# EAGLE board PCB (EAGLE 9.7.0)
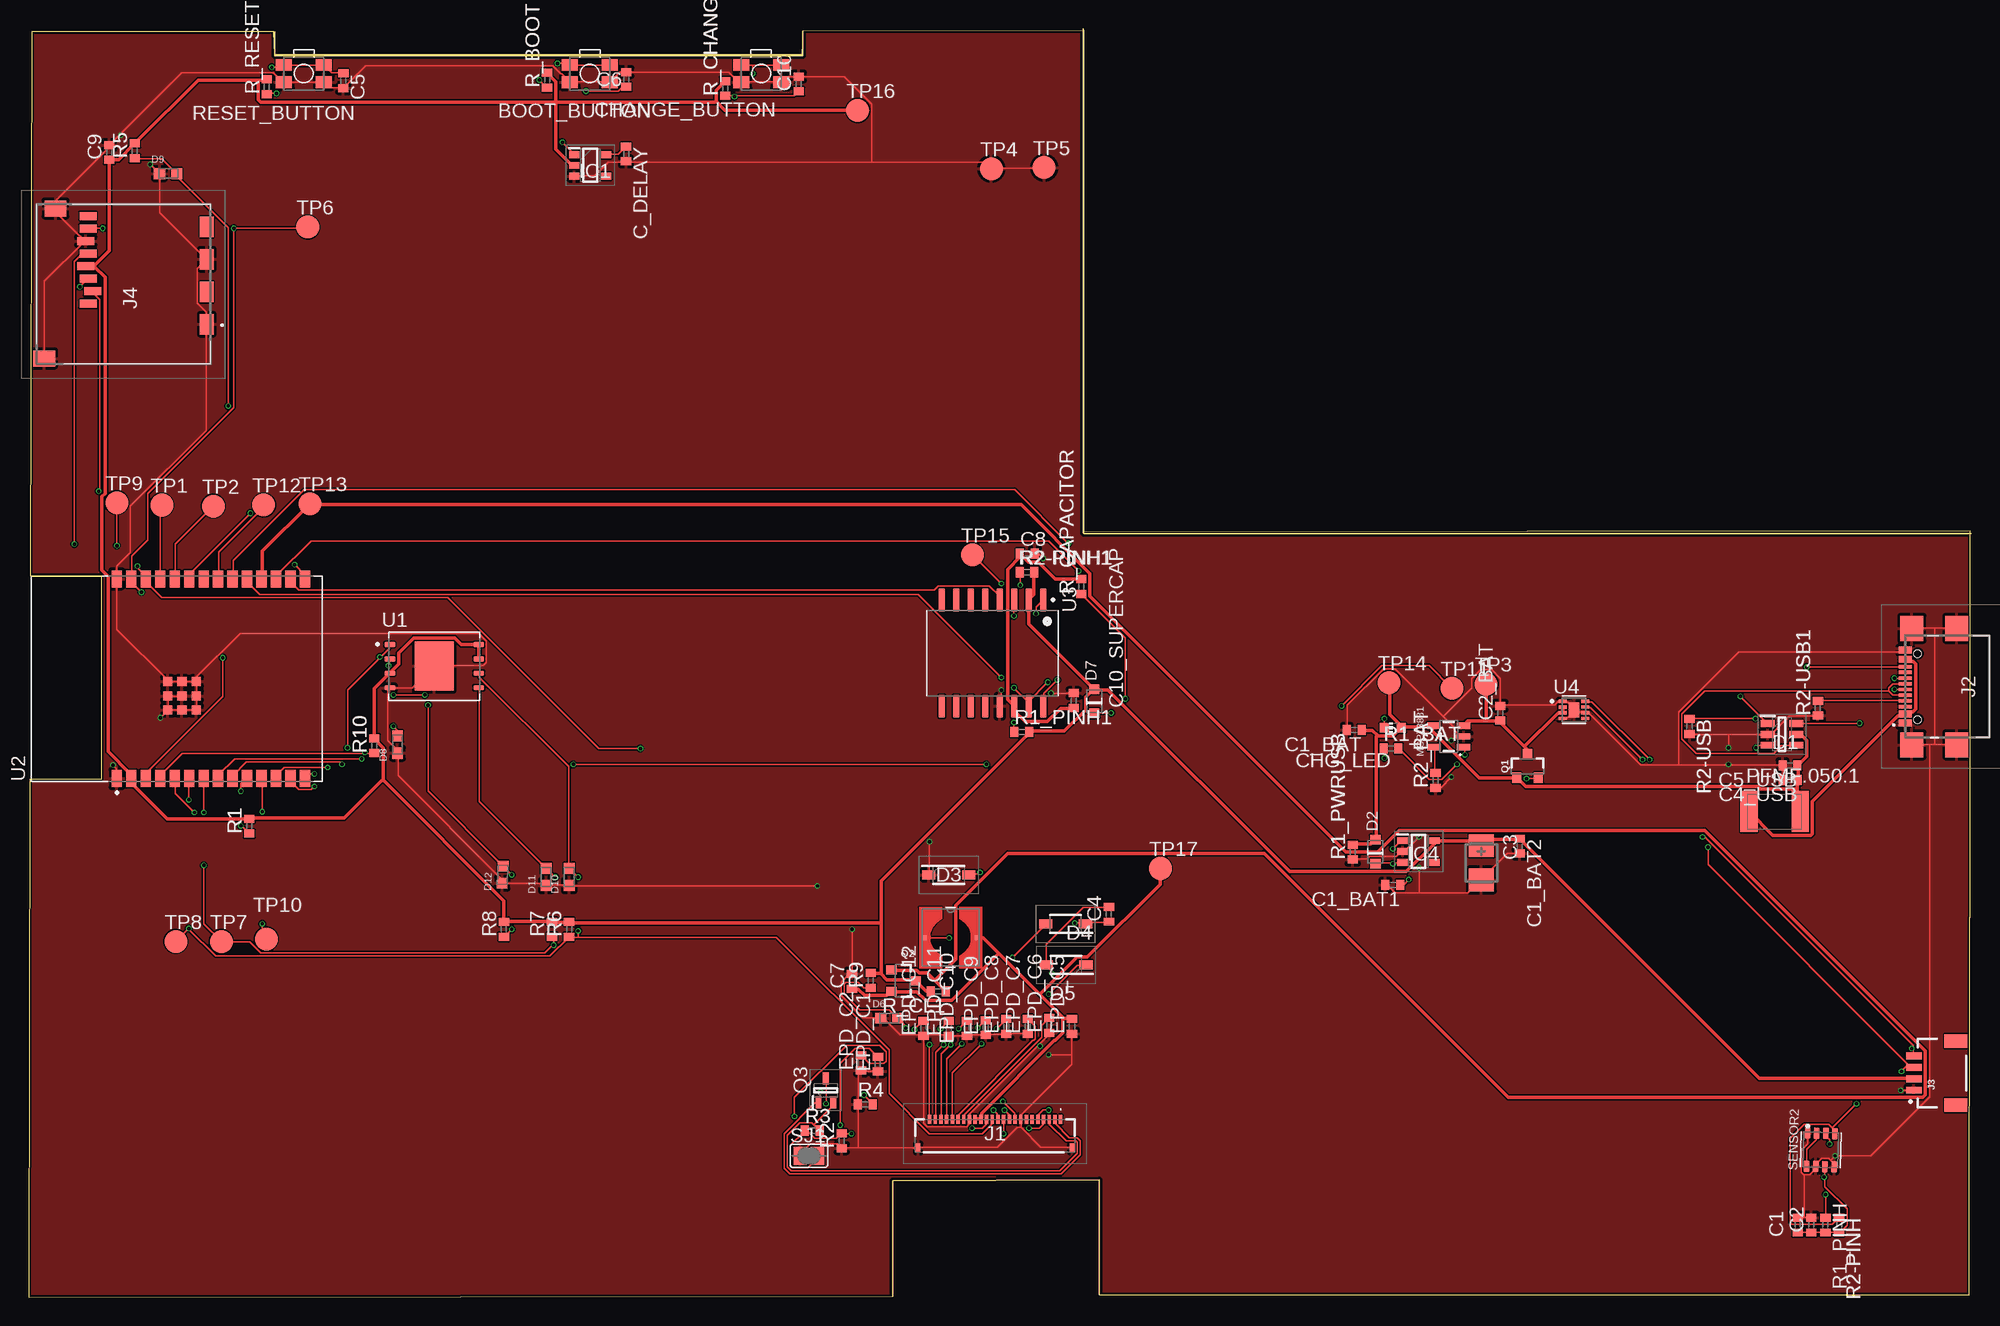
[diagram p0: board, top side]
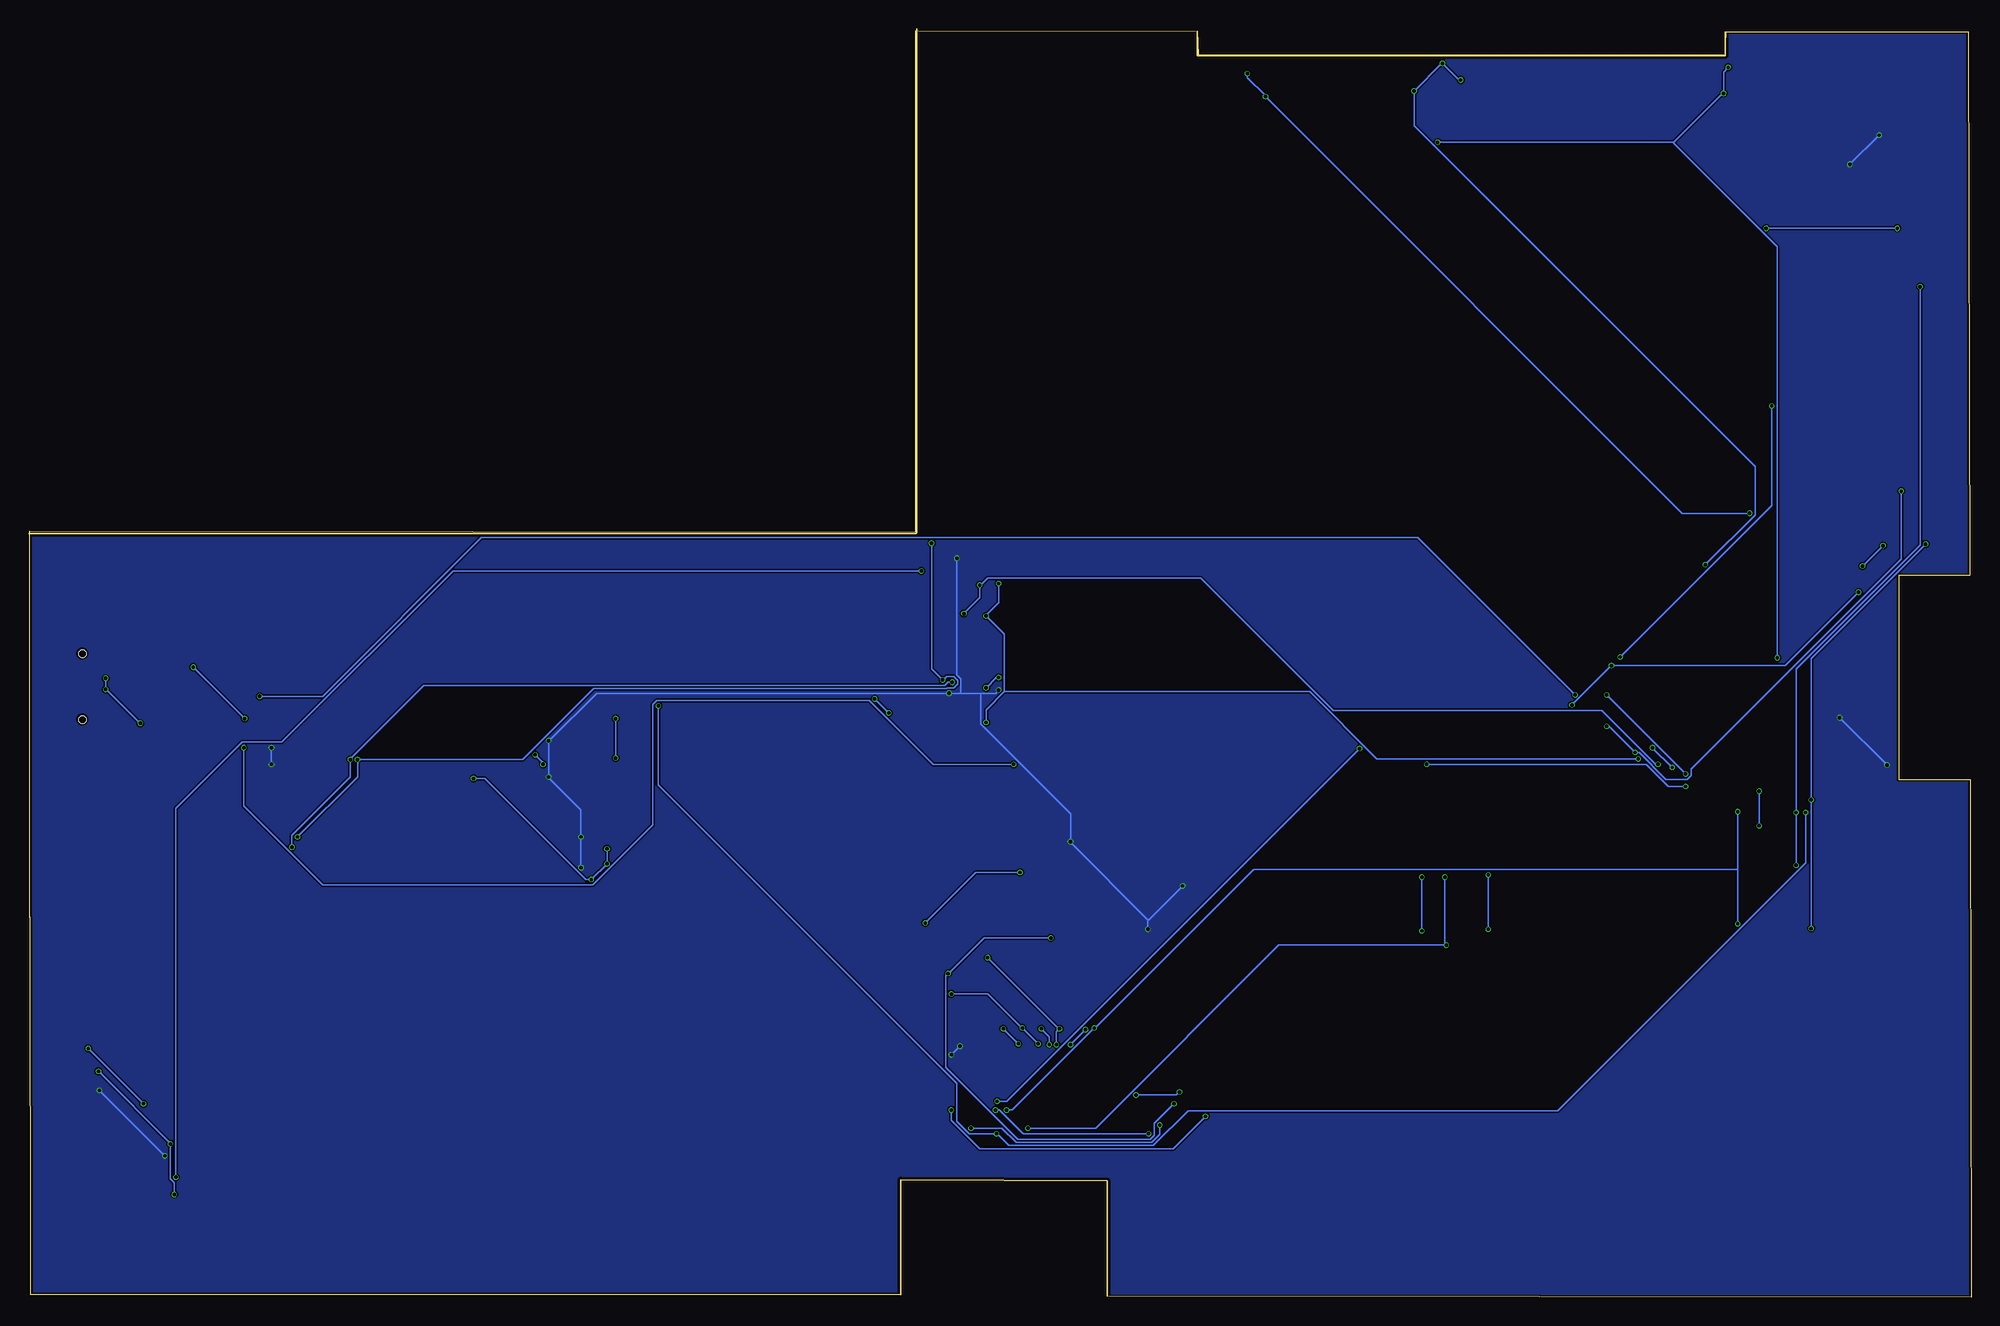
[diagram p1: board, bottom side, seen from below]

Size 170.4 x 111.3 mm. Coordinates in mm from the lower left corner, seen from the top.
Outline: 67.9,111.08 92.51,111.11 arc-90 92.6,111.02 92.6,67.1 170.3,67.2 170.3,33.35 arc-90 170.26,33.31 170.2,0.2 93.9,0.21 93.9,10.3 75.8,10.2 75.8,0.09 0,0 0.12,45.4 6.36,45.4 6.36,63.31 0.17,63.31 0.3,111 21.5,111 21.6,109 67.8,109 67.9,111.08
Outline: 92.5,111.3 92.5,67.1 arc90 92.6,67 170.4,67
Outline: 21.6,111 21.6,108.9 67.9,108.9 67.9,111.08
Copper layers (1*16): Top 0.035mm / dielectric 1.6mm / Bottom 0.035mm
Design rules "jlcpcb-2layers.dru": minimum track width 0.15mm, minimum drill 0.3mm, track to track 5mil, track to pad 5mil, pad to pad 5mil, via to via 5mil, smd to smd 5mil, copper to edge 0.2mm, drill to drill 6mil, minimum pad ring 10mil, minimum via ring 3mil, stop-mask expansion 4mil, vias tented up to drill 0mil, thermal gap 10mil
Net classes: 0 default: width 0.15 mm; 1 putere: width 0.3 mm

## Footprints (pad centres in the part's own frame; a part is rotated, then mirrored left to right if it is on the bottom)
MYBUTTON = smd 1.4 x 1.05: 1 1.75,0.75; 2 -1.75,0.75; 3 -1.75,-0.75; 4 1.75,-0.75
EAGLE-LTSPICE_C0402 = smd 0.7 x 0.9: 1 -0.65,0; 2 0.65,0
RCL_CT3528 = smd 2 x 2.2: + -1.5,0; - 1.5,0
ADAFRUIT_CHIP-LED0603 = smd 0.8 x 0.8: A 0,-0.75; C 0,0.75
SOT95P280X145-6N = smd 1.2 x 0.6: 1 -1.25,0.95; 2 -1.25,0; 3 -1.25,-0.95; 4 1.25,-0.95; 5 1.25,0; 6 1.25,0.95
ESP32_WROVER_AVX---SD0805S020S1R0_AVX_SD0805S020S1R0_0 = smd 0.8 x 0.9: 1 -1.05,0; 2 1.05,0
SOD3716X135N = smd 1.15 x 0.8: 1 -1.75,0; 2 1.75,0
DIOC1608X36N = smd 0.97 x 0.94: 1 -0.75,0; 2 0.75,0
SOT95P280X125-5N = smd 0.9 x 0.6: 1 -1.4,0.95; 2 -1.4,0; 3 -1.4,-0.95; 4 1.4,-0.95; 5 1.4,0.95
SOT95P280X120-5N = smd 0.9 x 0.6: 1 -1.4,0.95; 2 -1.4,0; 3 -1.4,-0.95; 4 1.4,-0.95; 5 1.4,0.95
FH34SRJ24S05SH99 = smd 0.3 x 0.8: 1 5.75,1.45; 2 5.25,1.45; 3 4.75,1.45; 4 4.25,1.45; 5 3.75,1.45; 6 3.25,1.45; 7 2.75,1.45; 8 2.25,1.45; 9 1.75,1.45; 10 1.25,1.45; 11 0.75,1.45; 12 0.25,1.45; 13 -0.25,1.45; 14 -0.75,1.45; 15 -1.25,1.45; 16 -1.75,1.45; 17 -2.25,1.45; 18 -2.75,1.45; 19 -3.25,1.45; 20 -3.75,1.45; 21 -4.25,1.45; 22 -4.75,1.45; 23 -5.25,1.45; 24 -5.75,1.45 | smd 0.4 x 0.8: MP1 6.75,-1.05; MP2 -6.75,-1.05
SAMACSYS_PARTS_USB4110GFA = smd 0.3 x 1.15: A1 -3.35,3.678; A4 -2.55,3.678; A5 -1.25,3.678; A6 -0.25,3.678; A7 0.25,3.678; A8 1.25,3.678; A9 2.55,3.678; A12 3.35,3.678; B1 3.05,3.678; B4 2.25,3.678; B5 1.75,3.678; B6 0.75,3.678; B7 -0.75,3.678; B8 -1.75,3.678; B9 -2.25,3.678; B12 -3.05,3.678 | smd 2.18 x 2: MP1 -5.11,-0.827; MP2 5.11,-0.827; MP3 -5.11,3.103; MP4 5.11,3.103 | hole 0.65: -2.89,2.603; 2.89,2.603
JST04_1MM_RA = smd 0.6 x 1.35: 1 -1.5,0; 2 -0.5,0; 3 0.5,0; 4 1.5,0 | smd 1.2 x 2: NC1 2.8,-3.675; NC2 -2.8,-3.675
112ATAARR03ATTEND = smd 1.8 x 1.2: G1 10.6,10.4; G2 4.9,10.4; S1 7.75,10.4; S2 2.05,10.4 | smd 1.4 x 1.9: G3 13.6,-3.85; G4 0.45,-2.85 | smd 0.7 x 1.5: P1 8.8,0; P2 7.7,0.4; P3 6.6,0; P4 5.5,-0.2; P5 4.4,0; P6 3.3,-0.2; P7 2.2,0; P8 1.1,0
IND_4828-WE-TPC_WRE = smd 0.381 x 0.381: 1 -2.286,0; 2 2.286,0
ESP32_WROVER_SPARKFUN-IC-POWER_SOT23-5 = smd 0.55 x 1.2: 1 -0.95,-1.3; 2 0,-1.3; 3 0.95,-1.3; 4 0.95,1.3; 5 -0.95,1.3
ESP32C6_VARISTOR_CT/CN1812 = smd 1.5 x 3.6: 1 -2.25,0; 2 2.25,0
ESP32_WROVER_SPARKFUN-DISCRETESEMI_SOT23-3 = smd 0.8 x 0.9: 1 -0.95,-1; 2 0.95,-1; 3 0,1.1
SOT65P210X110-3N = smd 1.05 x 0.5: 1 -1.05,0.65; 2 -1.05,-0.65; 3 1.05,0
ESP32_WROVER_EAGLE-LTSPICE_R0402 = smd 0.7 x 0.9: 1 -0.65,0; 2 0.65,0
ESP32_WROVER_BME680_PSON80P300X300X100-8N = smd 1.016 x 0.5: 1 1.458,1.2; 2 1.458,0.4; 3 1.458,-0.4; 4 1.458,-1.2; 5 -1.458,-1.22; 6 -1.458,-0.4; 7 -1.458,0.4; 8 -1.458,1.2
SJ = smd 1.168 x 1.6: 1 -0.762,0; 2 0.762,0
TP20R = smd 2 x 2: TP 0,0
SON127P600X800X80-9N = smd 0.94 x 0.44: 1 -3.895,1.905; 2 -3.895,0.635; 3 -3.895,-0.635; 4 -3.895,-1.905; 5 3.895,-1.905; 6 3.895,-0.635; 7 3.895,0.635; 8 3.895,1.905 | smd 3.4 x 4.3: 9 0,0
XCVR_ESP32-C6-WROOM-1-N8 = smd 1.5 x 0.9: 1 -8.75,5.26; 2 -8.75,3.99; 3 -8.75,2.72; 4 -8.75,1.45; 5 -8.75,0.18; 6 -8.75,-1.09; 7 -8.75,-2.36; 8 -8.75,-3.63; 9 -8.75,-4.9; 10 -8.75,-6.17; 11 -8.75,-7.44; 12 -8.75,-8.71; 13 -8.75,-9.98; 14 -8.75,-11.25; 15 8.75,-11.25; 16 8.75,-9.98; 17 8.75,-8.71; 18 8.75,-7.44; 19 8.75,-6.17; 20 8.75,-4.9; 21 8.75,-3.63; 22 8.75,-2.36; 23 8.75,-1.09; 24 8.75,0.18; 25 8.75,1.45; 26 8.75,2.72; 27 8.75,3.99; 28 8.75,5.26 | smd 0.8 x 0.8: 29_1 -2.755,0.79; 29_2 -1.505,0.79; 29_3 -0.255,0.79; 29_4 -2.755,-0.46; 29_5 -1.505,-0.46; 29_6 -0.255,-0.46; 29_7 -2.755,-1.71; 29_8 -1.505,-1.71; 29_9 -0.255,-1.71
SOIC127P1032X265-16N = smd 2.05 x 0.59: 1 -4.655,4.445; 2 -4.655,3.175; 3 -4.655,1.905; 4 -4.655,0.635; 5 -4.655,-0.635; 6 -4.655,-1.905; 7 -4.655,-3.175; 8 -4.655,-4.445; 9 4.655,-4.445; 10 4.655,-3.175; 11 4.655,-1.905; 12 4.655,-0.635; 13 4.655,0.635; 14 4.655,1.905; 15 4.655,3.175; 16 4.655,4.445
SON50P200X200X80-9N = smd 0.76 x 0.27: 1 -0.985,0.75; 4 -0.985,-0.75; 5 0.985,-0.75; 6 0.985,-0.25; 7 0.985,0.25; 8 0.985,0.75 | smd 0.76 x 0.3: 2 -0.985,0.25; 3 -0.985,-0.25 | smd 0.9 x 1.3: 9 0,0

## Placement (x,y rotation side)
BOOT_BUTTON  BUTTON_CUSYOMV1  [MYBUTTON]  49.23,107.35 180 top
C1  100nF  [EAGLE-LTSPICE_C0402]  155.16,6.32 90 top
C1_BAT  4.7uF  [EAGLE-LTSPICE_C0402]  116.26,49.75 180 top
C1_BAT1  4.7uF  [EAGLE-LTSPICE_C0402]  119.65,36.17 180 top
C1_BAT2  4.7uF  [EAGLE-LTSPICE_C0402]  130.79,39.57 270 top
C2  100nF  [EAGLE-LTSPICE_C0402]  156.34,6.32 90 top
C2_BAT  4.7uF  [EAGLE-LTSPICE_C0402]  129.08,51.23 90 top
C3  100uF TANT  [RCL_CT3528]  127.41,38.1 270 top
C4  4.7uF/25V  [EAGLE-LTSPICE_C0402]  94.75,33.59 90 top
C4_USB  100nF  [EAGLE-LTSPICE_C0402]  154.5,45.37 180 top
C5  1uF  [EAGLE-LTSPICE_C0402]  27.62,106.71 269.4 top
C5_USB  4.7uF  [EAGLE-LTSPICE_C0402]  154.48,46.65 180 top
C6  100nF  [EAGLE-LTSPICE_C0402]  52.42,106.83 90 top
C7  10uF  [EAGLE-LTSPICE_C0402]  72.22,27.71 90 top
C8  100nF  [EAGLE-LTSPICE_C0402]  87.6,65.23 0 top
C9  100nF  [EAGLE-LTSPICE_C0402]  7.08,100.43 90 top
C10  100nF  [EAGLE-LTSPICE_C0402]  67.56,106.43 90 top
C10_SUPERCAP  CPH3225A  [EAGLE-LTSPICE_C0402]  91.67,52.34 90 top
C_DELAY  100nF  [EAGLE-LTSPICE_C0402]  52.41,100.29 270 top
CHANGE_BUTTON  BUTTON_CUSYOMV1  [MYBUTTON]  64.26,107.35 180 top
CHG_LED  [ADAFRUIT_CHIP-LED0603]  119.64,49.95 90 top
D1  USBLC6-2SC6Y  [SOT95P280X145-6N]  153.78,49.37 0 top
D2  ESP32_WROVER_AVX---SD0805S020S1R0_AVX_SD0805S020S1R0_0_0AVX_SD0805S020S1R0_0_0  [ESP32_WROVER_AVX---SD0805S020S1R0_AVX_SD0805S020S1R0_0]  118.12,39.08 90 top
D3  MBR0530  [SOD3716X135N]  80.71,37.05 0 top
D4  MBR0530  [SOD3716X135N]  90.95,32.75 180 top
D5  MBR0530  [SOD3716X135N]  90.99,29.15 180 top
D6  PGB1010603MR  [DIOC1608X36N]  75.48,24.47 0 top
D7  ESP32_WROVER_AVX---SD0805S020S1R0_AVX_SD0805S020S1R0_0_0AVX_SD0805S020S1R0_0_0  [ESP32_WROVER_AVX---SD0805S020S1R0_AVX_SD0805S020S1R0_0]  93.47,52.28 90 top
D8  PGB1010603MR  [DIOC1608X36N]  32.36,48.47 90 top
D9  PGB1010603MR  [DIOC1608X36N]  12.24,98.57 0 top
D10  PGB1010603MR  [DIOC1608X36N]  47.42,36.87 90 top
D11  PGB1010603MR  [DIOC1608X36N]  45.4,36.87 90 top
D12  PGB1010603MR  [DIOC1608X36N]  41.58,37.07 87.7 top
EPD_C1  1uF/50V  [EAGLE-LTSPICE_C0402]  74.49,20.45 90 top
EPD_C2  1uF/50V  [EAGLE-LTSPICE_C0402]  73,20.55 90 top
EPD_C5  1uF/50V  [EAGLE-LTSPICE_C0402]  91.51,23.75 90 top
EPD_C6  1uF/50V  [EAGLE-LTSPICE_C0402]  89.52,23.85 90 top
EPD_C7  1uF/50V  [EAGLE-LTSPICE_C0402]  87.63,23.75 90 top
EPD_C8  1uF/50V  [EAGLE-LTSPICE_C0402]  85.74,23.75 90 top
EPD_C9  1uF/50V  [EAGLE-LTSPICE_C0402]  83.95,23.65 90 top
EPD_C10  1uF/50V  [EAGLE-LTSPICE_C0402]  82.3,23.59 90 top
EPD_C11  1uF/50V  [EAGLE-LTSPICE_C0402]  80.71,23.57 90 top
EPD_C12  1uF/50V  [EAGLE-LTSPICE_C0402]  78.49,23.59 90 top
IC1  BD5229G-TR  [SOT95P280X125-5N]  49.27,99.29 0 top
IC4  XC6220A331MR-G  [SOT95P280X120-5N]  121.91,39.09 0 top
J1  FH34SRJ-24S-0.5SH_99_  [FH34SRJ24S05SH99]  84.77,14.14 0 top
J2  SAMACSYS_PARTS_USB4110-GF-A  [SAMACSYS_PARTS_USB4110GFA]  168.27,53.56 90 top
J3  QWIIC_RIGHT_ANGLE  [JST04_1MM_RA]  165.35,19.66 90 top
J4  112A-TAAR-R03_ATTEND  [112ATAARR03ATTEND]  5.22,95.95 270 top
L1  68uH  [IND_4828-WE-TPC_WRE]  80.87,31.55 0 top
MCP73831  ESP32_WROVER_SPARKFUN-IC-POWER_MCP73831  [ESP32_WROVER_SPARKFUN-IC-POWER_SOT23-5]  124.55,49.19 90 top
PFMF.050.1  ESP32C6_VARISTORCN1812  [ESP32C6_VARISTOR_CT/CN1812]  153.14,42.6 0 top
Q1  20V/4.2A/52mΩ/1.4W  [ESP32_WROVER_SPARKFUN-DISCRETESEMI_SOT23-3]  131.46,46.56 0 top
Q2  20V/4.2A/52mΩ/1.4W  [ESP32_WROVER_SPARKFUN-DISCRETESEMI_SOT23-3]  76.68,27.76 270 top
Q3  SI1308EDL-T1-GE3  [SOT65P210X110-3N]  69.92,18.15 90 top
R1  10K  [ESP32_WROVER_EAGLE-LTSPICE_R0402]  19.36,41.31 90 top
R1_BAT  200  [ESP32_WROVER_EAGLE-LTSPICE_R0402]  119.49,48.13 0 top
R1_PINH  10K  [ESP32_WROVER_EAGLE-LTSPICE_R0402]  157.59,6.32 270 top
R1_PINH1  10K  [ESP32_WROVER_EAGLE-LTSPICE_R0402]  87.11,49.59 0 top
R1_PWRUSB  100K  [ESP32_WROVER_EAGLE-LTSPICE_R0402]  116.13,39.04 90 top
R2  2.2  [ESP32_WROVER_EAGLE-LTSPICE_R0402]  71.32,13.71 90 top
R2-PINH  10K  [ESP32_WROVER_EAGLE-LTSPICE_R0402]  158.79,6.32 270 top
R2-PINH1  10K  [ESP32_WROVER_EAGLE-LTSPICE_R0402]  87.57,63.59 0 top
R2-USB  5k1  [ESP32_WROVER_EAGLE-LTSPICE_R0402]  145.67,50.07 270 top
R2-USB1  5k1  [ESP32_WROVER_EAGLE-LTSPICE_R0402]  156.93,51.67 90 top
R2_BAT  2K  [ESP32_WROVER_EAGLE-LTSPICE_R0402]  123.4,45.33 90 top
R3  0.47  [ESP32_WROVER_EAGLE-LTSPICE_R0402]  68.74,14.61 0 top
R4  10K  [ESP32_WROVER_EAGLE-LTSPICE_R0402]  73.38,16.91 0 top
R5  10K\  [ESP32_WROVER_EAGLE-LTSPICE_R0402]  9.32,100.57 90 top
R6  10K  [ESP32_WROVER_EAGLE-LTSPICE_R0402]  47.41,32.27 90 top
R7  10K  [ESP32_WROVER_EAGLE-LTSPICE_R0402]  45.9,32.27 90 top
R8  10K  [ESP32_WROVER_EAGLE-LTSPICE_R0402]  41.69,32.27 90 top
R9  10K  [ESP32_WROVER_EAGLE-LTSPICE_R0402]  73.86,27.78 90 top
R10  10K  [ESP32_WROVER_EAGLE-LTSPICE_R0402]  30.33,48.37 90 top
R_BOOT  10K  [ESP32_WROVER_EAGLE-LTSPICE_R0402]  45.48,106.77 90 top
R_CAPACITOR  15  [ESP32_WROVER_EAGLE-LTSPICE_R0402]  92.33,62.34 90 top
R_CHANGE  10K  [ESP32_WROVER_EAGLE-LTSPICE_R0402]  61.1,106.04 90 top
R_CL1  10k  [ESP32_WROVER_EAGLE-LTSPICE_R0402]  79.78,26.83 180 top
R_RESET  10K  [ESP32_WROVER_EAGLE-LTSPICE_R0402]  20.89,106.19 90 top
RESET_BUTTON  BUTTON_CUSYOMV1  [MYBUTTON]  24.15,107.35 180 top
SENSOR2  BME688  [ESP32_WROVER_BME680_PSON80P300X300X100-8N]  157.18,12.92 88.4 top
SJ1  [SJ]  68.44,12.39 0 top
TP1  TPTP20R  [TP20R]  11.69,69.49 0 top
TP2  TPTP20R  [TP20R]  16.21,69.39 0 top
TP3  TPTP20R  [TP20R]  127.83,53.79 0 top
TP4  TPTP20R  [TP20R]  84.45,98.99 0 top
TP5  TPTP20R  [TP20R]  89.07,99.09 0 top
TP6  TPTP20R  [TP20R]  24.49,93.89 0 top
TP7  TPTP20R  [TP20R]  16.91,31.19 0 top
TP8  TPTP20R  [TP20R]  12.93,31.19 0 top
TP9  TPTP20R  [TP20R]  7.75,69.69 0 top
TP10  TPTP20R  [TP20R]  20.87,31.41 0 top
TP11  TPTP20R  [TP20R]  124.82,53.41 0 top
TP12  TPTP20R  [TP20R]  20.62,69.51 0 top
TP13  TPTP20R  [TP20R]  24.67,69.61 0 top
TP14  TPTP20R  [TP20R]  119.32,53.91 0 top
TP15  TPTP20R  [TP20R]  82.77,65.11 0 top
TP16  TPTP20R  [TP20R]  72.72,104.11 0 top
TP17  TPTP20R  [TP20R]  99.27,37.61 0 top
U1  W25Q512JVEIQ  [SON127P600X800X80-9N]  35.59,55.36 0 top
U2  ESP32-C6-WROOM-1-N8  [XCVR_ESP32-C6-WROOM-1-N8]  13,54.26 90 top
U3  DS3231SN#  [SOIC127P1032X265-16N]  84.55,56.5 270 top
U4  MAX17048G+T10  [SON50P200X200X80-9N]  135.54,51.52 0 top

## Library data of the parts
BOOT_BUTTON CHANGE_BUTTON CHG_LED PFMF.050.1 RESET_BUTTON SJ1 TP1-TP17 = DeskAssistant v19 v1
C1 C1_BAT C1_BAT1 C1_BAT2 C2 C2_BAT C4 C4_USB C5 C5_USB C6-C10 C10_SUPERCAP C_DELAY EPD_C1 EPD_C2 EPD_C5-EPD_C12 = DeskAssistant v19 v1; SPICEMODEL: NONE; SPICEPREFIX: C
C3 = DeskAssistant v19 v1; SPICEPREFIX: C
D1 = DeskAssistant v19 v1; AVAILABILITY: In Stock; CHECK_PRICES: https://www.snapeda.com/parts/USBLC6-2SC6Y/STMicroelectronics/view-part/?ref=eda; DESCRIPTION: 17V Clamp 5A (8/20µs) Ipp Tvs Diode Surface Mount SOT-23-6; MF: STMicroelectronics; MP: USBLC6-2SC6Y; PACKAGE: SOT-23-6 STMicroelectronics; PRICE: None; SNAPEDA_LINK: https://www.snapeda.com/parts/USBLC6-2SC6Y/STMicroelectronics/view-part/?ref=snap
D2 D7 = DeskAssistant v19 v1; CENTROID_NOT_SPECIFIED: No; DATASHEET: http://datasheets.avx.com/schottky.pdf; DIGIKEY_DESCRIPTION: DIODE SCHOTTKY 20V 1A 0805; DIGIKEY_PART_NUMBER: 478-7800-1-ND; LEAD_FREE: yes; MF: AVX; MOUSER_PART_NUMBER: 581-SD0805S020S1R0; PACKAGE: 0805 (2012 metric); PREFIX: D; ROHS: yes; TEMPERATURE_RANGE_HIGH: +125°C; TEMPERATURE_RANGE_LOW: -55°C
D3-D5 = DeskAssistant v19 v1; AVAILABILITY: In Stock; CHECK_PRICES: https://www.snapeda.com/parts/MBR0530/Onsemi/view-part/?ref=eda; DESCRIPTION: Diode Schottky 30 V 500mA Surface Mount SOD-123; MF: ON Semiconductor; MP: MBR0530; PACKAGE: SOD-123-2 ON Semiconductor; PRICE: None; PURCHASE-URL: https://www.snapeda.com/api/url_track_click_mouser/?unipart_id=179458&manufacturer=ON Semiconductor&part_name=MBR0530&search_term=None; SNAPEDA_LINK: https://www.snapeda.com/parts/MBR0530/Onsemi/view-part/?ref=snap
D6 D8-D12 = DeskAssistant v19 v1; AVAILABILITY: In Stock; CHECK_PRICES: https://www.snapeda.com/parts/PGB1010603MR/Littelfuse/view-part/?ref=eda; DESCRIPTION: 150V (Typ) Clamp - Ipp Tvs Diode Surface Mount 0603 (1608 Metric); MF: Littelfuse Inc.; MP: PGB1010603MR; PACKAGE: 0603 Littelfuse Inc.; PRICE: None; PURCHASE-URL: https://www.snapeda.com/api/url_track_click_mouser/?unipart_id=5659453&manufacturer=Littelfuse Inc.&part_name=PGB1010603MR&search_term=None; SNAPEDA_LINK: https://www.snapeda.com/parts/PGB1010603MR/Littelfuse/view-part/?ref=snap
IC1 = DeskAssistant v19 v1; DESCRIPTION: Voltage Detector with Adjustable Delay Time: CMOS processes are utilized to develop high precision, low current consumption CMOS reset ICs that allow arbitrary setting of the delay time. The extensive lineup includes both Nch Open Drain and CMOS output types in a wide range of detection voltages (from 2.3V to 6.0V, in 0.1V steps), enabling selection of the ideal solution based on customer requirements. In addition, the entire series is of course both lead-free and RoHS-compliant.; HEIGHT: 1.25mm; MANUFACTURER_NAME: ROHM Semiconductor; MANUFACTURER_PART_NUMBER: BD5229G-TR; MOUSER_PART_NUMBER: 755-BD5229G-TR; MOUSER_PRICE-STOCK: https://www.mouser.co.uk/ProductDetail/ROHM-Semiconductor/BD5229G-TR?qs=4kLU8WoGk0vvnhrrYwdszw%3D%3D
IC4 = DeskAssistant v19 v1; DESCRIPTION: LDO Voltage Regulators; HEIGHT: 1.2mm; MANUFACTURER_NAME: Torex; MANUFACTURER_PART_NUMBER: XC6220A331MR-G; MOUSER_PART_NUMBER: 865-XC6220A331MR-G; MOUSER_PRICE-STOCK: https://www.mouser.co.uk/ProductDetail/Torex-Semiconductor/XC6220A331MR-G?qs=AsjdqWjXhJ8ZSWznL1J0gg%3D%3D
J1 = DeskAssistant v19 v1; DESCRIPTION: 24 Position FFC, FPC Connector Contacts, Top and Bottom 0.020" (0.50mm) Surface Mount, Right Angle; HEIGHT: 1.1mm; MANUFACTURER_NAME: Hirose; MANUFACTURER_PART_NUMBER: FH34SRJ-24S-0.5SH(99); MOUSER_PART_NUMBER: 798-FH34SRJ24S05SH99; MOUSER_PRICE-STOCK: https://www.mouser.co.uk/ProductDetail/Hirose-Connector/FH34SRJ-24S-0.5SH99?qs=vcbW%252B4%252BSTIpKBl5ap9J8Fw%3D%3D
J2 = DeskAssistant v19 v1; DESCRIPTION: CONN USB 2.0 TYPE-C R/A SMT; HEIGHT: 3.26mm; MANUFACTURER_NAME: GCT (GLOBAL CONNECTOR TECHNOLOGY); MANUFACTURER_PART_NUMBER: USB4110-GF-A; MOUSER_PART_NUMBER: 640-USB4110-GF-A; MOUSER_PRICE-STOCK: https://www.mouser.co.uk/ProductDetail/GCT/USB4110-GF-A?qs=KUoIvG%2F9IlYiZvIXQjyJeA%3D%3D
J3 = DeskAssistant v19 v1; PROD_ID: CONN-13694
J4 = DeskAssistant v19 v1; DESCRIPTION: Micro SD Card Socket, Push-Push Type, Top Mount, SMT, H=1.83mm, 10u; HEIGHT: 1.9mm; MANUFACTURER_NAME: ATTEND; MANUFACTURER_PART_NUMBER: 112A-TAAR-R03 ATTEND
L1 = DeskAssistant v19 v1; COPYRIGHT: Copyright (C) 2024 Ultra Librarian. All rights reserved.; MANUFACTURER_PART_NUMBER: 744043680; MFR_NAME: Wurth Electronics
MCP73831 = DeskAssistant v19 v1; PROD_ID: IC-09995
Q1 Q2 = DeskAssistant v19 v1; PROD_ID: TRAN-14388
Q3 = DeskAssistant v19 v1; AVAILABILITY: In Stock; CHECK_PRICES: https://www.snapeda.com/parts/SI1308EDL-T1-GE3/Vishay+Siliconix/view-part/?ref=eda; DESCRIPTION: Si1308EDL-T1-GE3 N-channel MOSFET Transistor, 1.5 A, 30 V, 3-Pin SC-70 | Siliconix / Vishay SI1308EDL-T1-GE3; MF: Vishay Siliconix; MP: SI1308EDL-T1-GE3; PACKAGE: SOT-323 Vishay Semiconductor; PRICE: None; PURCHASE-URL: https://www.snapeda.com/api/url_track_click_mouser/?unipart_id=274603&manufacturer=Vishay Siliconix&part_name=SI1308EDL-T1-GE3&search_term=None; SNAPEDA_LINK: https://www.snapeda.com/parts/SI1308EDL-T1-GE3/Vishay+Siliconix/view-part/?ref=snap
R1 R1_BAT R1_PINH R1_PINH1 R1_PWRUSB R2 R2-PINH R2-PINH1 R2-USB R2-USB1 R2_BAT R3-R10 R_BOOT R_CAPACITOR R_CHANGE R_CL1 R_RESET = DeskAssistant v19 v1; SPICEMODEL: NONE; SPICEPREFIX: R
SENSOR2 = DeskAssistant v19 v1; AVAILABILITY: Unavailable; DESCRIPTION: Integrated Environmental Unit; MF: Bosch Sensortec; MP: BME680; PACKAGE: LGA-8 Bosch Tools; PRICE: None
U1 = DeskAssistant v19 v1; AVAILABILITY: In Stock; CHECK_PRICES: https://www.snapeda.com/parts/W25Q512JVEIQ/Winbond+Electronics/view-part/?ref=eda; DESCRIPTION: FLASH - NOR Memory IC 512Mb (64M x 8) SPI - Quad I/O 133 MHz 8-WSON (8x6); MF: Winbond Electronics; MP: W25Q512JVEIQ; PACKAGE: Package; PRICE: None; SNAPEDA_LINK: https://www.snapeda.com/parts/W25Q512JVEIQ/Winbond+Electronics/view-part/?ref=snap
U2 = DeskAssistant v19 v1; AVAILABILITY: In Stock; CHECK_PRICES: https://www.snapeda.com/parts/ESP32-C6-WROOM-1-N8/Espressif+Systems/view-part/?ref=eda; DESCRIPTION: Multiprotocol Modules ESP32-C6 module, Wi-Fi 6 in 2.4 GHz band, Bluetooth 5, Zigbee 3.0 and Thread. ESP34-WROOM Compatible - ENGINEERING SAMPLE; MF: Espressif Systems; MP: ESP32-C6-WROOM-1-N8; PACKAGE: None; PRICE: None; SNAPEDA_LINK: https://www.snapeda.com/parts/ESP32-C6-WROOM-1-N8/Espressif+Systems/view-part/?ref=snap
U3 = DeskAssistant v19 v1; AVAILABILITY: In Stock; CHECK_PRICES: https://www.snapeda.com/parts/DS3231SN%23/Analog+Devices/view-part/?ref=eda; DESCRIPTION: Extremely Accurate I²C-Integrated RTC/TCXO/Crystal; MF: Analog Devices; MP: DS3231SN#; PACKAGE: SOIC-16 Maxim; PRICE: None; PURCHASE-URL: https://www.snapeda.com/api/url_track_click_mouser/?unipart_id=99048&manufacturer=Analog Devices&part_name=DS3231SN#&search_term=None; SNAPEDA_LINK: https://www.snapeda.com/parts/DS3231SN%23/Analog+Devices/view-part/?ref=snap
U4 = DeskAssistant v19 v1; AVAILABILITY: In Stock; CHECK_PRICES: https://www.snapeda.com/parts/MAX17048G+T10/Analog+Devices/view-part/?ref=eda; DESCRIPTION: 3µA 1-Cell/2-Cell Fuel Gauge with ModelGauge; MF: Analog Devices; MP: MAX17048G+T10; PACKAGE: TDFN-8 Maxim; PRICE: None; PURCHASE-URL: https://www.snapeda.com/api/url_track_click_mouser/?unipart_id=329239&manufacturer=Analog Devices&part_name=MAX17048G+T10&search_term=None; SNAPEDA_LINK: https://www.snapeda.com/parts/MAX17048G+T10/Analog+Devices/view-part/?ref=snap

## Nets
3V3 [putere]: C1_BAT2.1 C3.+ C9.1 D7.2 IC1.2 IC4.5 J3.2 J4.P4 Q2.3 R1.2 R1_PINH1.2 R2-PINH1.2 R5.2 R6.2 R7.2 R8.2 R9.2 R10.2 R_BOOT.2 R_CHANGE.2 R_CL1.2 R_RESET.2 TP16.TP U1.3 U1.7 U1.8 U2.2 U3.2
32KHZ: R2-PINH1.1 U2.9 U3.1
DN: D1.4 J2.A7 J2.B7
DP: D1.6 J2.A6 J2.B6
EPD_3V3 [putere]: C7.1 EPD_C5.2 J1.15 J1.16 L1.2 Q2.2 TP17.TP
EPD_3V3_C [putere]: Q2.1 R_CL1.1 TP13.TP U2.18
EPD_BUSY: J1.9 TP9.TP U2.26
EPD_CS: D6.2 J1.12 R9.1 TP10.TP U2.11
EPD_DC: J1.11 TP11.TP U2.5
EPD_RST: TP12.TP U2.21
FLASH_CS: D9.2 R5.1 U1.1 U2.12
GDR: J1.2 Q3.1 R4.2
GND: BOOT_BUTTON.1 BOOT_BUTTON.2 C1.2 C1_BAT1.2 C1_BAT2.2 C1_BAT.2 C2.2 C2_BAT.2 C3.- C4_USB.2 C5.2 C5_USB.2 C6.2 C7.2 C8.2 C9.2 C10.2 C10_SUPERCAP.2 C_DELAY.2 CHANGE_BUTTON.1 CHANGE_BUTTON.2 D1.2 D3.1 D6.1 D8.1 D9.1 D10.1 D11.1 D12.1 EPD_C1.1 EPD_C2.1 EPD_C5.1 EPD_C6.1 EPD_C7.1 EPD_C8.1 EPD_C9.1 EPD_C10.1 EPD_C11.1 EPD_C12.1 IC1.3 IC4.2 J1.8 J1.17 J1.MP1 J1.MP2 J2.A1 J2.A12 J2.B1 J2.B12 J2.MP1 J2.MP2 J2.MP3 J2.MP4 J3.1 J4.G1 J4.G2 J4.G3 J4.G4 J4.P6 MCP73831.2 R1_PWRUSB.1 R2-USB1.1 R2-USB.2 R2.1 R2_BAT.1 R4.1 RESET_BUTTON.1 RESET_BUTTON.2 SENSOR2.1 SENSOR2.5 SENSOR2.7 SJ1.1 TP4.TP TP5.TP U1.4 U1.9 U2.1 U2.28 U2.29_1 U2.29_2 U2.29_3 U2.29_4 U2.29_5 U2.29_6 U2.29_7 U2.29_8 U2.29_9 U3.13 U4.1 U4.4 U4.6 U4.9
GPIO8: R1.1 U2.10
I2C_PW: C1.1 C2.1 R1_PINH.2 R2-PINH.2 SENSOR2.6 U2.17
INT_RTC: R1_PINH1.1 TP15.TP U2.8 U3.3
IO/BOOT: BOOT_BUTTON.3 BOOT_BUTTON.4 C6.1 R_BOOT.1 U2.15
IO/CHANGE: C10.1 CHANGE_BUTTON.3 CHANGE_BUTTON.4 R_CHANGE.1 U2.23
MISO: D12.2 J4.P7 R8.1 TP6.TP U1.2 U2.27
MOSI: D11.2 J1.14 J4.P3 R7.1 TP7.TP U1.5 U2.7
N$1: J2.A5 R2-USB1.2
N$2: J2.B5 R2-USB.1
N$3: MCP73831.1 R1_BAT.2
N$4: CHG_LED.C R1_BAT.1
N$6: C1_BAT1.1 D2.1 IC4.1 IC4.3 Q1.2
N$7: C4.1 D3.2 D4.1
N$8: MCP73831.5 R2_BAT.2
N$9: EPD_C1.2 J1.4
N$11: EPD_C10.2 J1.22
N$12: C_DELAY.1 IC1.5
N$13: EPD_C12.2 J1.24
N$14: D7.1 R_CAPACITOR.1
N$15: EPD_C7.2 J1.19
N$16: EPD_C8.2 J1.20
N$18: EPD_C6.2 J1.18
N$19: SENSOR2.2 SENSOR2.8
N$21: EPD_C2.2 J1.5
PREVGH: D5.1 EPD_C9.2 J1.21
PREVGL: D4.2 EPD_C11.2 J1.23
RESE: J1.3 Q3.2 R3.2
RESE': J1.10 R2.2 R3.1 SJ1.2
RESET: C5.1 IC1.1 R_RESET.1 RESET_BUTTON.3 RESET_BUTTON.4 U2.3
RTC_RST: U2.16 U3.4
RX: TP2.TP U2.24
SCK: D10.2 J1.13 J4.P5 R6.1 TP8.TP U1.6 U2.6
SCL: J3.4 R2-PINH.1 SENSOR2.4 U2.20 U3.16 U4.7
SDA: J3.3 R1_PINH.1 SENSOR2.3 U2.19 U3.15 U4.8
SRC: C4.2 D5.2 L1.1 Q3.3
SS_SD: D8.2 J4.P2 R10.1 U2.4
TX: TP1.TP U2.25
USB_D+: D1.1 U2.14
USB_D-: D1.3 U2.13
VBAT [putere]: C2_BAT.1 MCP73831.3 Q1.3 TP3.TP U4.2 U4.3
VBUS [putere]: C1_BAT.1 C4_USB.1 C5_USB.1 CHG_LED.A D1.5 D2.2 MCP73831.4 PFMF.050.1.2 Q1.1 R1_PWRUSB.2 TP14.TP
VRTC [putere]: C8.1 C10_SUPERCAP.1 R_CAPACITOR.2 U3.14
VUSB [putere]: J2.A4 J2.A9 J2.B4 J2.B9 PFMF.050.1.1

## Tracks (layer width: path | path; a pad name or v marks a point on that pad's centre or on a via)
3V3
  Top 0.3: 20.15,106.78 14.89,106.78 9.42,101.31 R5.2 9.28,101.17 7.89,99.79 7.13,99.79 C9.1 7.06,99.65 7.06,91.83 5.75,90.51 | 20.15,106.78 20.84,106.78 R_RESET.2 | 5.75,90.51 5.05,90.51 J4.P4 | 46.26,104.84 46.26,106.64 45.5,107.41 R_BOOT.2 | 46.26,104.84 46.26,100.69 47.64,99.31 47.85,99.31 IC1.2 | 60.32,104.91 60.32,105.88 61.08,106.64 R_CHANGE.2 | 60.32,104.91 61.08,104.15 72.71,104.15 TP16.TP | 46.26,104.84 60.18,104.84 60.32,104.91 | 20.15,106.78 20.15,105.05 20.36,104.84 46.26,104.84 | J3.2 165.3,19.18 151.8,19.18 130.88,40.1 C1_BAT2.1 130.74,40.16 128.11,40.16 127.56,39.61 C3.+ 127.35,39.61 126.94,40.03 123.33,40.03 IC4.5 123.27,39.89 123.27,39.75 120.84,37.33 110.59,37.33 94.67,53.25 93.56,53.25 D7.2 | R_CL1.2 79.08,26.87 78.67,26.87 77.84,27.7 Q2.3 77.7,27.84 75.28,27.84 74.72,28.39 | 74.72,28.39 73.89,28.39 R9.2 | R2-PINH1.2 88.16,63.57 88.16,61.63 87.74,61.22 U3.2 87.74,61.01 87.74,59.07 93.35,53.46 D7.2 | D7.2 93.42,53.32 92.73,52.63 92.73,51.52 90.86,49.65 87.81,49.65 R1_PINH1.2 87.74,49.44 74.79,36.49 74.79,32.83 | 74.79,32.83 74.79,28.53 74.72,28.39 | U1.7 39.47,56.02 39.47,57.2 U1.8 39.33,57.27 37.95,57.27 37.4,57.82 33.79,57.82 32.48,56.51 32.48,55.54 31.79,54.85 U1.3 31.65,54.71 30.33,53.39 R10.2 30.4,48.89 31.09,48.2 31.09,45.36 | 31.09,45.36 41.69,34.76 41.69,33.1 R8.2 41.76,32.96 45.84,32.96 R7.2 46.05,32.89 47.37,32.89 R6.2 47.51,32.83 74.79,32.83 | 31.09,45.36 30.95,45.29 27.7,42.03 19.46,42.03 R1.2 19.32,41.97 12.19,41.97 9.07,45.08 9.07,45.5 U2.2 8.93,45.64 8.93,45.91 6.99,47.85 6.99,63.23 6.44,63.78 6.44,70.22 6.72,70.5 6.72,89.47 5.82,90.37 5.75,90.51
32KHZ  (via drill 0.3)
  Top 0.15: v86.98,62.46 86.98,63.57 R2-PINH1.1 | v88.36,59.97 88.36,60.52 88.99,61.15 U3.1 | v27.49,46.74 27.29,46.95 19.11,46.95 17.94,45.77 17.94,45.57 U2.9
  Bottom 0.15: v88.36,59.97 86.98,61.35 v86.98,62.46 86.91,62.46 86.28,63.09 67.59,63.09 55.95,51.45 32.41,51.45 27.7,46.74 v27.49,46.74
DN
  Top 0.15: 163.15,53.18 163.5,52.84 164.54,52.84 J2.B7 | 163.15,53.18 163.15,53.46 163.5,53.81 164.54,53.81 J2.A7 | 163.15,53.18 147.02,53.18 145.01,51.18 145.01,48.96 146.26,47.71 153.04,47.71 153.74,48.41 154.98,48.41 D1.4
DP  (via drill 0.3)
  Top 0.15: v163.64,53.32 164.54,53.32 J2.A6 | v163.64,54.29 164.54,54.29 J2.B6 | v160.59,50.34 155.05,50.34 D1.6
  Bottom 0.15: v163.64,54.29 v163.64,53.32 163.57,53.32 v160.59,50.34
EPD_3V3
  Top 0.3: C7.1 72.23,27.01 72.78,27.01 73.34,26.45 75.28,26.45 75.62,26.8 Q2.2 75.83,26.8 77.91,26.8 78.67,26.04 80.95,26.04 85.07,30.16 | J1.16 83.03,15.65 83.52,15.65 J1.15 83.58,15.79 83.58,16.14 89.96,22.51 90.03,22.51 90.72,23.2 90.72,24.31 90.79,24.45 | 90.79,24.45 91.48,24.45 EPD_C5.2 | 85.07,30.16 83.72,31.51 83.17,31.51 L1.2 | 85.07,30.16 88.67,26.56 | 88.67,26.56 90.79,24.45 | 88.67,26.56 91.96,29.85 92.86,29.85 99.23,36.22 99.23,37.6 TP17.TP
EPD_3V3_C
  Top 0.3: 79.46,27.8 80.4,26.87 R_CL1.1 | 79.46,27.8 78.81,28.46 78.11,28.46 77.91,28.67 75.69,28.67 Q2.1 | U2.18 20.5,63.02 20.5,65.44 24.65,69.6 TP13.TP 24.79,69.53 87.05,69.53 93.07,63.5 93.07,61.49 115.51,39.06 118.35,39.06 120.22,40.93 147.02,40.93 166.34,21.61 166.34,17.73 166.13,17.52 129.77,17.52 108.38,38.92 85.87,38.92 81.3,34.35 81.3,29.64 79.46,27.8
EPD_BUSY  (via drill 0.3)
  Top 0.15: v85.45,17.17 86.49,16.14 86.49,15.65 J1.9 | v53.67,48.13 50,48.13 36.77,61.35 11.7,61.35 10.32,62.74 10.32,62.95 U2.26 10.25,63.02 10.25,63.29 9.56,63.99 v9.56,64.13 | v7.76,65.93 7.76,69.67 TP9.TP
  Bottom 0.15: v85.45,17.17 84.62,17.17 v53.67,48.13 | v9.56,64.13 v7.76,65.93
EPD_CS  (via drill 0.3)
  Top 0.15: v20.5,42.59 20.5,45.5 U2.11 | v20.5,32.76 20.5,31.79 20.84,31.44 TP10.TP | v84.62,16.41 84.97,16.07 84.97,15.65 J1.12 | v76.94,23.61 76.94,23.75 76.24,24.45 D6.2 76.17,24.52 75.48,25.21 72.92,25.21 71.53,26.59 71.53,27.49 71.67,27.63 72.78,27.63 73.27,27.15 73.82,27.15 R9.1
  Bottom 0.15: v20.5,32.76 20.5,37.53 | 20.5,37.53 v20.5,42.59 | v84.62,16.41 84.14,16.41 v76.94,23.61 76.87,23.61 62.95,37.53 20.5,37.53
EPD_DC  (via drill 0.3)
  Top 0.15: v85.52,14.34 J1.11 | v115.16,51.87 118.69,55.4 122.85,55.4 124.79,53.46 TP11.TP | v14.54,42.52 12.88,44.18 12.88,45.5 U2.5
  Bottom 0.15: v115.16,51.87 115.16,44.94 88.99,18.77 88.99,15.44 87.88,14.34 v85.52,14.34 85.45,14.34 84.42,13.3 71.74,13.3 68.7,16.34 36.29,16.34 14.54,38.09 v14.54,42.52
EPD_RST
  Top 0.15: U2.21 16.69,63.02 16.69,65.37 20.57,69.25 20.57,69.46 TP12.TP
FLASH_CS  (via drill 0.3)
  Top 0.15: R5.1 9.35,99.86 11.7,99.86 12.95,98.61 D9.2 13.02,98.54 13.02,98.33 17.52,93.83 v17.52,78.18 | 30.85,56.13 27.98,53.25 v27.98,48.2 | 30.85,56.13 31.65,56.92 31.65,57.2 U1.1 | v26.25,46.47 22.44,46.47 21.74,45.77 21.74,45.57 U2.12 | v30.82,56.16 30.85,56.13
  Bottom 0.15: v26.25,46.47 v27.98,48.2 | v17.52,78.18 17.52,69.46 v30.82,56.16
GDR  (via drill 0.3)
  Top 0.15: J1.2 90.03,15.23 91.27,13.99 91.96,13.99 92.24,13.71 92.24,12.46 90.58,10.8 66.76,10.8 66.27,11.29 66.27,14.34 68.97,17.04 69.25,17.04 Q3.1 69.25,17.17 69.46,17.38 v69.46,18 | v73.27,17.73 74.03,16.97 R4.2
  Bottom 0.15: v73.27,17.73 69.73,17.73 v69.46,18
GND  (via drill 0.3)
  Top 0.15: U2.29_1 12.26,51.52 12.26,52.7 U2.29_2 12.33,52.7 13.43,52.7 U2.29_5 | U2.29_1 12.33,51.52 13.43,51.52 U2.29_4 13.5,51.52 14.68,51.52 U2.29_7 14.75,51.52 14.75,52.7 U2.29_8 14.75,52.77 14.75,53.95 U2.29_9 | v7.41,46.67 7.69,46.4 7.69,45.57 U2.1 | v11.56,50.83 12.19,51.45 U2.29_1 | U2.29_9 14.68,54.02 13.5,54.02 U2.29_6 13.43,54.02 12.26,54.02 U2.29_3 12.26,54.08 7.76,58.59 7.76,62.95 U2.28 7.76,63.02 7.76,64.13 8.93,65.3 8.93,69.39 15.58,76.04 15.58,85.32 J4.G1 15.58,85.39 15.58,86.42 14.82,87.19 14.82,90.23 15.58,91 J4.G2 15.58,91.06 11.49,95.15 11.49,98.54 D9.1 11.43,98.61 v10.66,99.37 | U2.29_9 14.68,54.08 14.68,54.36 18.56,58.24 39.47,58.24 40.16,57.55 40.16,55.68 39.89,55.4 35.59,55.4 U1.9 35.52,55.33 33.66,53.46 31.72,53.46 U1.4 31.65,53.39 31.51,53.25 31.51,48.82 32.34,47.99 32.34,47.78 D8.1 32.41,47.71 32.41,45.77 41.48,36.7 41.48,36.36 D12.1 41.55,36.29 45.22,36.29 45.36,36.15 D11.1 45.43,36.15 47.37,36.15 D10.1 47.44,36.08 v69.18,36.08 | IC1.3 47.92,98.4 49.65,98.4 50.83,99.58 52.35,99.58 C_DELAY.2 52.42,99.58 73.96,99.58 | TP5.TP 89.06,99.03 84.48,99.03 TP4.TP 84.42,99.03 83.86,99.58 73.96,99.58 | 73.96,99.58 73.96,104.64 71.53,107.06 67.59,107.06 C10.2 67.52,107.06 66.48,107.06 66.06,106.64 CHANGE_BUTTON.2 66,106.64 62.53,106.64 CHANGE_BUTTON.1 62.46,106.64 62.26,106.64 61.42,107.48 52.49,107.48 C6.2 52.35,107.48 51.87,107.48 51.04,106.64 BOOT_BUTTON.2 50.97,106.64 47.51,106.64 BOOT_BUTTON.1 47.44,106.64 46.74,107.34 46.67,107.34 45.98,108.03 29.57,108.03 27.63,106.09 C5.2 27.56,106.09 26.45,106.09 25.97,106.58 RESET_BUTTON.2 25.83,106.58 22.44,106.58 RESET_BUTTON.1 22.37,106.64 22.23,106.64 21.47,107.41 13.43,107.41 8,101.97
  Top 0.15: J4.G3 1.39,82.41 1.39,89.12 4.92,92.66 J4.P6 4.99,92.66 4.5,93.14 4.43,93.14 2.42,95.15 2.42,95.43 J4.G4 2.42,95.5 2.42,96.26 7.06,100.9 7.06,101.04 C9.2 7.13,101.11 8,101.97 | v8.1,101.94 8.03,101.94 8,101.97 | 87.05,14.89 88.78,13.16 91.48,13.16 J1.MP1 | 87.05,14.89 87.05,15.58 J1.8 87.05,15.65 87.05,16 91.48,20.43 91.48,21.26 | 91.48,21.26 91.48,23.06 EPD_C5.1 | EPD_C1.1 74.44,19.8 72.99,19.8 EPD_C2.1 72.99,19.88 72.78,19.67 72.78,16.97 R4.1 72.78,16.9 72.78,13.09 | 72.78,13.09 71.33,13.09 R2.1 71.26,13.09 70.91,13.43 68.56,13.43 67.73,12.6 67.73,12.4 SJ1.1 | 72.78,13.09 77.97,13.09 J1.MP2 78.05,13.16 84.97,13.16 86.7,14.89 87.05,14.89 | 88.61,22.12 89.47,22.99 89.47,23.2 EPD_C6.1 | 88.61,22.12 82.55,16.07 82.55,15.65 J1.17 82.48,15.58 82.48,15.17 82.27,14.96 78.81,14.96 78.53,15.23 78.53,22.92 EPD_C12.1 | EPD_C12.1 78.53,22.99 80.68,22.99 EPD_C11.1 80.75,22.92 82.27,22.92 EPD_C10.1 82.34,22.99 83.93,22.99 EPD_C9.1 84,23.06 85.73,23.06 EPD_C8.1 85.8,23.13 87.6,23.13 EPD_C7.1 | EPD_C12.1 78.46,22.99 76.45,22.99 75,24.45 74.79,24.45 D6.1 74.72,24.52 73.2,24.52 71.26,26.45 71.26,27.63 71.95,28.32 72.16,28.32 C7.2 72.23,28.39 v72.23,32.27 | v89.68,52.98 91.62,52.98 C10_SUPERCAP.2 | v85.32,53.25 85.32,51.94 85.25,51.87 U3.13 | v88.99,64.82 88.64,65.16 88.29,65.16 C8.2 | v79.01,39.96 79.01,37.12 D3.1 | v89.47,21.26 91.48,21.26 | 88.61,22.12 v88.71,22.02 | 121.95,35.46 126.24,35.46 127.35,36.56 C3.- 127.42,36.63 129.71,38.92 130.74,38.92 C1_BAT2.2 | 121.95,35.46 119.87,35.46 119.18,36.15 119.04,36.15 C1_BAT1.2 | R1_PWRUSB.1 116.13,38.43 117.38,38.43 117.59,38.64 119.94,38.64 120.36,39.06 120.5,39.06 IC4.2 120.56,39.13 120.7,39.13 v121.95,40.37
  Top 0.15: 124.06,50.93 125,50 125,49.79 125.55,49.24 125.83,49.24 MCP73831.2 125.34,49.38 v124.79,48.82 | 124.06,50.93 119.87,55.12 118.83,55.12 115.65,51.94 115.65,49.79 C1_BAT.2 | v124.79,45.64 123.89,44.74 123.4,44.74 R2_BAT.1 | v121.95,37.67 121.95,35.46 | 155.74,6.99 156.3,6.99 C2.2 | 155.74,6.99 155.19,6.99 C1.2 | 158.06,12.02 157.89,12.19 157.27,12.19 156.78,11.7 156.78,11.49 SENSOR2.7 156.71,11.43 156.71,11.22 156.23,10.73 155.74,10.73 | 158.06,12.02 158.31,11.77 158.31,11.49 SENSOR2.5 | 155.74,10.73 155.67,10.73 155.47,10.94 155.47,12.88 156.02,13.43 SENSOR2.1 | 155.74,10.73 155.74,6.99 | v164.19,18.14 165.3,18.14 J3.1 | 158.06,12.02 v158.44,12.4 161.56,12.4 166.75,17.59 166.75,48.48 | J2.B12 164.61,50.48 164.61,50.28 J2.A1 164.61,50.14 164.61,49.03 165.16,48.48 J2.MP3 165.23,48.48 166.75,48.48 | 166.75,48.48 167.17,48.48 | 167.17,48.48 169.04,48.48 J2.MP1 | 167.17,58.72 165.23,58.72 J2.MP4 165.16,58.66 164.61,58.1 164.61,56.92 J2.A12 164.61,56.85 164.61,56.65 J2.B1 164.54,56.58 150,56.58 144.73,51.31 144.73,46.67 | 167.17,58.72 169.04,58.72 J2.MP2 | 167.17,58.72 167.17,48.48 | 149.09,49.38 152.49,49.38 D1.2 152.56,49.38 152.84,49.38 154.43,50.97 156.92,50.97 R2-USB1.1 | 149.09,49.38 145.7,49.38 R2-USB.2 | C4_USB.2 153.87,45.43 153.87,46.6 C5_USB.2 153.8,46.67 149.09,46.67 | U4.4 134.62,50.83 134.97,50.83 135.59,51.45 U4.9 | U4.9 135.52,51.59 135.52,51.66 134.97,52.22 134.62,52.22 U4.1 134.48,52.28 134.21,52.28 133.86,51.94 129.08,51.94 C2_BAT.2 129.08,52.01 129.08,54.29 128.32,55.05 127.35,55.05 126.59,54.29 126.59,53.46 124.06,50.93 | U4.9 135.66,51.45 135.8,51.31 136.49,51.31 U4.6 136.56,51.24 136.84,51.24 141.41,46.67 144.73,46.67
  Top 0.15: 144.73,46.67 149.09,46.67 | v149.09,48.2 149.09,49.38 | v149.09,46.74 149.09,46.67
  Bottom 0.15: v11.56,50.83 v7.41,46.67 | v8.1,101.94 v10.66,99.37 | 86.91,52.98 85.59,52.98 v85.32,53.25 | 86.91,52.98 88.64,52.98 | 88.64,52.98 v89.68,52.98 120.56,52.98 124.72,48.82 v124.79,48.82 v124.79,45.64 124.79,45.57 121.95,42.73 v121.95,40.37 v121.95,37.67 | v88.99,64.82 88.99,54.57 88.64,54.22 88.64,52.98 | 86.91,52.98 86.91,50.28 79.01,42.38 v79.01,39.96 79.01,39.89 72.23,33.1 | 72.23,33.1 v72.23,32.27 | v88.71,22.02 v89.47,21.26 | v158.44,12.4 v164.19,18.14 | v149.09,46.74 v149.09,48.2 | v69.18,36.08 72.16,33.1 72.23,33.1
  pour Top: 6.42,45.36 6.4,45.34 6.37,45.32 0.2,45.32 0.08,-0.01 75.72,0.08 75.72,10.2 75.72,10.21 75.72,10.21 75.72,10.22 75.73,10.23 75.74,10.24 75.74,10.24 75.74,10.24 75.75,10.25 75.76,10.26 75.76,10.26 75.76,10.26 75.77,10.27 75.78,10.28 75.78,10.28 75.78,10.28 75.8,10.28 93.88,10.38 93.88,10.38 93.9,10.38 93.91,10.38 93.91,10.38 93.92,10.38 93.93,10.37 93.94,10.36 93.94,10.36 93.94,10.36 93.95,10.35 93.96,10.34 93.96,10.34 93.96,10.34 93.97,10.33 93.98,10.32 93.98,10.32 93.98,10.32 93.98,10.3 93.98,10.29 93.98,10.29 93.98,0.08 170.12,0.07 170.18,33.3 170.18,33.31 170.18,33.32 170.18,33.32 170.19,33.33 170.19,33.34 170.19,33.35 170.2,33.35 170.2,33.36 170.2,33.36 170.21,33.37 170.22,33.37 170.22,33.38 170.22,33.38 170.22,67.12 92.62,67.02 92.62,67.02 92.6,67.02 92.58,67.02 92.58,67.02 92.58,67.02 92.57,67.03 92.56,67.04 92.56,67.04 92.56,67.04 92.55,67.05 92.54,67.06 92.54,67.06 92.54,67.06 92.53,67.07 92.52,67.08 92.52,67.08 92.52,67.08 92.52,67.1 92.52,67.12 92.52,67.12 92.52,111.01 92.52,111.02 92.52,111.03 92.52,111.03 92.51,111.03 92.5,111.03 67.97,111 67.88,109 67.88,108.98 67.88,108.98 67.88,108.98 67.87,108.97 67.86,108.96 67.86,108.96 67.86,108.95 67.85,108.94 67.84,108.94 67.84,108.93 67.84,108.93 67.83,108.93 67.82,108.92 67.81,108.92 67.81,108.92 67.8,108.92 21.6,108.92 21.59,108.92 21.59,108.92 21.58,108.92 21.57,108.93 21.56,108.93 21.56,108.93 21.56,108.94 21.55,108.94 21.54,108.95 21.54,108.96 21.54,108.96 21.53,108.97 21.52,108.98 21.52,108.98 21.52,108.98 21.52,109 21.43,110.92 0.38,110.92 0.25,63.38 6.37,63.38 6.4,63.37 6.42,63.35 6.43,63.32 6.43,45.38
  pour Bottom: 6.42,45.36 6.4,45.34 6.37,45.32 0.2,45.32 0.08,-0.01 75.72,0.08 75.72,10.2 75.72,10.21 75.72,10.21 75.72,10.22 75.73,10.23 75.74,10.24 75.74,10.24 75.74,10.24 75.75,10.25 75.76,10.26 75.76,10.26 75.76,10.26 75.77,10.27 75.78,10.28 75.78,10.28 75.78,10.28 75.8,10.28 93.88,10.38 93.88,10.38 93.9,10.38 93.91,10.38 93.91,10.38 93.92,10.38 93.93,10.37 93.94,10.36 93.94,10.36 93.94,10.36 93.95,10.35 93.96,10.34 93.96,10.34 93.96,10.34 93.97,10.33 93.98,10.32 93.98,10.32 93.98,10.32 93.98,10.3 93.98,10.29 93.98,10.29 93.98,0.08 170.12,0.07 170.18,33.3 170.18,33.31 170.18,33.32 170.18,33.32 170.19,33.33 170.19,33.34 170.19,33.35 170.2,33.35 170.2,33.36 170.2,33.36 170.21,33.37 170.22,33.37 170.22,33.38 170.22,33.38 170.22,67.12 92.62,67.02 92.62,67.02 92.6,67.02 92.58,67.02 92.58,67.02 92.58,67.02 92.57,67.03 92.56,67.04 92.56,67.04 92.56,67.04 92.55,67.05 92.54,67.06 92.54,67.06 92.54,67.06 92.53,67.07 92.52,67.08 92.52,67.08 92.52,67.08 92.52,67.1 92.52,67.12 92.52,67.12 92.52,111.01 92.52,111.02 92.52,111.03 92.52,111.03 92.51,111.03 92.5,111.03 67.97,111 67.88,109 67.88,108.98 67.88,108.98 67.88,108.98 67.87,108.97 67.86,108.96 67.86,108.96 67.86,108.95 67.85,108.94 67.84,108.94 67.84,108.93 67.84,108.93 67.83,108.93 67.82,108.92 67.81,108.92 67.81,108.92 67.8,108.92 21.6,108.92 21.59,108.92 21.59,108.92 21.58,108.92 21.57,108.93 21.56,108.93 21.56,108.93 21.56,108.94 21.55,108.94 21.54,108.95 21.54,108.96 21.54,108.96 21.53,108.97 21.52,108.98 21.52,108.98 21.52,108.98 21.52,109 21.43,110.92 0.38,110.92 0.25,63.38 6.37,63.38 6.4,63.37 6.42,63.35 6.43,63.32 6.43,45.38
GPIO8  (via drill 0.3)
  Top 0.15: v18.63,41.34 18.7,41.34 19.32,40.72 R1.1 | v18.63,44.39 18.63,45.01 19.11,45.5 U2.10
  Bottom 0.15: v18.63,44.39 v18.63,41.34
I2C_PW  (via drill 0.3)
  Top 0.15: C1.1 155.19,5.68 156.3,5.68 C2.1 156.37,5.68 157.54,5.68 R1_PINH.2 157.61,5.68 158.72,5.68 R2-PINH.2 158.86,5.68 159.48,6.3 159.48,7.76 157.54,9.7 157.54,10.53 | 157.54,10.53 157.54,11.43 SENSOR2.6 | v92.1,63.71 89.47,66.34 24.79,66.34 21.74,63.29 21.74,63.02 U2.17 | v157.47,10.53 157.54,10.53
  Bottom 0.15: v92.1,63.71 133.17,63.71 148.19,48.68 151.66,48.68 157.47,42.87 v157.47,10.53
INT_RTC  (via drill 0.3)
  Top 0.15: v86.42,50.41 86.42,49.65 R1_PINH1.1 | v86.42,59.76 86.42,61.15 U3.3 | v29.22,47.23 18.07,47.23 16.69,45.84 16.69,45.57 U2.8 | v85.32,62.6 82.82,65.09 TP15.TP
  Bottom 0.15: v86.42,50.41 86.42,51.52 84.83,53.12 | 84.83,53.12 84.83,58.17 v86.42,59.76 86.42,59.83 85.32,60.94 v85.32,62.6 | v29.22,47.23 52.15,47.23 58.03,53.12 84.83,53.12
IO/BOOT  (via drill 0.3)
  Top 0.15: v44.8,106.78 45.43,106.16 R_BOOT.1 | v46.4,108.24 47.3,108.24 47.44,108.1 BOOT_BUTTON.4 47.51,108.1 50.97,108.1 BOOT_BUTTON.3 | v48.89,105.81 51.73,105.81 52.08,106.16 52.35,106.16 C6.1 | v23.34,64.26 24.24,63.36 24.24,63.02 U2.15
  Bottom 0.15: v44.8,106.78 44.94,106.78 v46.4,108.24 46.47,108.24 v48.89,105.81 48.89,102.77 18.97,72.85 18.97,68.63 v23.34,64.26
IO/CHANGE  (via drill 0.3)
  Top 0.15: 63.5,108.1 66,108.1 CHANGE_BUTTON.3 | 63.5,108.1 62.53,108.1 CHANGE_BUTTON.4 | 61.91,105.4 67.17,105.4 67.52,105.75 C10.1 | 61.91,105.4 61.15,105.4 R_CHANGE.1 | v19.46,68.77 14.13,63.43 14.13,63.02 U2.23 | v61.91,105.33 61.91,105.4 | v63.5,107.34 63.5,108.1
  Bottom 0.15: v19.46,68.77 25.35,68.77 v61.91,105.33 61.91,105.4 63.5,106.99 v63.5,107.34
MISO  (via drill 0.3)
  Top 0.15: v42.38,32.27 41.76,31.65 R8.1 | v42.38,37.05 D12.2 41.55,37.88 35.04,44.39 v35.04,51.94 | v31.58,55.4 31.65,55.47 31.65,55.95 U1.2 | v6.51,93.76 5.26,93.76 J4.P7 | TP6.TP 24.45,93.83 24.38,93.76 v18,93.76 18,78.05 10.46,70.5 10.46,66.41 9.07,65.03 9.07,63.02 U2.27 9.07,62.95 9.07,62.67 v9.9,61.84
  Bottom 0.15: v42.38,37.05 v42.38,32.27 | v35.04,51.94 v31.58,55.4 16.34,55.4 v9.9,61.84 | v18,93.76 v6.51,93.76
MOSI  (via drill 0.3)
  Top 0.15: v15.37,42.52 15.37,45.5 U2.7 | v15.37,37.88 15.37,32.76 16.9,31.23 TP7.TP 16.97,31.16 19.39,31.16 20.36,30.19 45.29,30.19 45.98,30.89 v46.05,30.89 46.05,31.44 45.91,31.58 R7.1 | v4.5,88.64 5.19,89.33 J4.P3 | U1.5 39.54,53.39 39.54,43.49 45.36,37.67 D11.2 45.43,37.6 v46.19,36.84 | v82.75,14.82 83.65,14.82 84,15.17 84,15.58 J1.14
  Bottom 0.15: v15.37,37.88 v15.37,42.52 15.37,55.12 4.5,66 v4.5,88.64 | v82.75,14.82 76.8,14.82 60.73,30.89 v46.05,30.89 46.19,30.95 v46.19,36.84
N$1
  Top 0.15: R2-USB1.2 156.99,52.35 164.54,52.35 J2.A5
N$2  (via drill 0.3)
  Top 0.15: v151.45,50.76 145.7,50.76 R2-USB.1 | v155.95,55.26 164.54,55.26 J2.B5
  Bottom 0.15: v155.95,55.26 v151.45,50.76
N$3  (via drill 0.3)
  Top 0.15: v125.27,46.74 123.96,45.43 122.85,45.43 R1_BAT.2 | v125.97,47.58 125.97,48.13 125.9,48.2 MCP73831.1
  Bottom 0.15: v125.27,46.74 125.27,46.88 v125.97,47.58
N$4  (via drill 0.3)
  Top 0.15: v118.9,50.76 118.9,50 CHG_LED.C | v118.9,47.3 118.9,48.13 R1_BAT.1
  Bottom 0.15: v118.9,47.3 v118.9,50.76
N$6  (via drill 0.3)
  Top 0.15: 119.66,38.09 120.5,38.09 IC4.3 | 119.66,38.09 118.14,38.09 D2.1 | v121.05,36.63 120.63,36.22 120.36,36.22 C1_BAT1.1 | v119.66,38.02 119.66,38.09 | v119.66,39.33 120.36,40.03 120.5,40.03 IC4.1 | v131.37,45.5 132.41,45.5 Q1.2
  Bottom 0.15: v119.66,39.33 v119.66,38.02 v121.05,36.63 121.53,36.63 130.4,45.5 v131.37,45.5
N$7  (via drill 0.3)
  Top 0.15: C4.1 94.73,32.89 92.86,32.89 92.73,32.76 D4.1 92.73,32.83 v91.76,32.83 | v83.45,37.26 83.31,37.12 82.48,37.12 D3.2
  Bottom 0.15: v83.45,37.26 87.32,37.26 v91.76,32.83
N$8
  Top 0.15: R2_BAT.2 123.33,45.98 123.33,48.13 123.27,48.2 MCP73831.5
N$9  (via drill 0.3)
  Top 0.15: v87.74,14.82 88.64,14.82 88.99,15.17 88.99,15.58 J1.4 | v71.19,15.1 71.19,20.5 72.5,21.81 73.75,21.81 74.44,21.12 EPD_C1.2
  Bottom 0.15: v87.74,14.82 85.04,14.82 83.79,13.57 71.88,13.57 71.19,14.27 v71.19,15.1
N$11  (via drill 0.3)
  Top 0.15: v80.88,22.16 80.05,21.33 80.05,15.65 J1.22 | v81.58,23.55 82.27,24.24 EPD_C10.2
  Bottom 0.15: v80.88,22.16 80.88,22.85 v81.58,23.55
N$12
  Top 0.15: IC1.5 50.69,100.27 51.73,100.27 52.35,100.9 C_DELAY.1
N$13  (via drill 0.3)
  Top 0.15: v79.01,22.16 79.01,15.65 J1.24 | v77.7,23.48 78.46,24.24 EPD_C12.2
  Bottom 0.15: v77.7,23.48 v79.01,22.16
N$14  (via drill 0.3)
  Top 0.15: v94.94,51.24 93.49,51.24 D7.1 | v96.19,52.49 96.19,57.82 92.38,61.63 R_CAPACITOR.1
  Bottom 0.15: v96.19,52.49 v94.94,51.24
N$15
  Top 0.15: J1.19 81.58,15.65 81.58,16 88.09,22.51 88.16,22.51 88.29,22.64 88.29,23.75 87.67,24.38 EPD_C7.2
N$16  (via drill 0.3)
  Top 0.15: v83.58,22.23 81.02,19.67 81.02,15.65 J1.20 | v84.9,23.55 85.73,24.38 EPD_C8.2
  Bottom 0.15: v84.9,23.55 v83.58,22.23
N$18
  Top 0.15: J1.18 82.06,15.65 82.06,16 88.85,22.78 88.85,23.82 89.47,24.45 EPD_C6.2
N$19
  Top 0.15: SENSOR2.8 155.95,11.56 155.95,12.95 156.78,13.78 156.78,14.34 SENSOR2.2
N$21  (via drill 0.3)
  Top 0.15: v89.47,16.41 88.99,16.41 88.57,16 88.57,15.65 J1.5 | v67.17,15.86 67.17,17.52 71.74,22.09 74.65,22.09 75.21,21.54 75.21,20.71 75,20.5 73.75,20.5 73.06,21.19 EPD_C2.2
  Bottom 0.15: v89.47,16.41 89.47,15.51 86.98,13.02 70.01,13.02 v67.17,15.86
PREVGH  (via drill 0.3)
  Top 0.15: v81.85,22.23 80.54,20.91 80.54,15.65 J1.21 | v83.24,23.61 83.93,24.31 EPD_C9.2 | v89.47,26.59 91.96,29.09 92.73,29.09 D5.1
  Bottom 0.15: v81.85,22.23 v83.24,23.61 83.31,23.61 86.28,26.59 v89.47,26.59
PREVGL  (via drill 0.3)
  Top 0.15: v80.26,22.16 79.57,21.47 79.57,15.65 J1.23 | v79.98,23.55 80.68,24.24 EPD_C11.2 | v86.28,29.78 89.19,32.69 D4.2
  Bottom 0.15: v80.26,22.16 80.26,23.27 v79.98,23.55 80.05,23.55 v86.28,29.78
RESE
  Top 0.15: 68.87,15.13 R3.2 | 68.87,15.13 68.7,15.3 67.66,15.3 66.55,14.2 66.55,11.43 66.89,11.08 90.44,11.08 91.96,12.6 91.96,13.57 91.83,13.71 91,13.71 89.54,15.17 89.54,15.58 J1.3 | 68.87,15.13 70.57,16.83 70.57,17.04 Q3.2
RESE'  (via drill 0.3)
  Top 0.15: v85.59,16.41 86.01,16 86.01,15.65 J1.10 | v72.16,14.34 71.33,14.34 R2.2 71.26,14.34 70.84,13.92 68.97,13.92 68.35,14.54 68.14,14.54 R3.1 68.07,14.54 66.83,13.3 66.83,11.56 67.03,11.36 68.35,11.36 69.18,12.19 69.18,12.33 SJ1.2
  Bottom 0.15: v85.59,16.41 85.25,16.41 83.17,14.34 v72.16,14.34
RESET  (via drill 0.3)
  Top 0.15: C5.1 27.56,107.41 26.59,107.41 25.97,108.03 RESET_BUTTON.3 25.83,108.1 22.44,108.1 RESET_BUTTON.4 22.37,108.03 22.23,107.89 v21.33,107.89 | v21.74,105.61 20.91,105.61 R_RESET.1 | v46.81,101.31 47.85,100.27 IC1.1 | v17.04,56.09 17.04,52.7 10.32,45.98 10.32,45.57 U2.3
  Bottom 0.15: v21.33,107.89 21.74,107.48 v21.74,105.61 21.81,105.61 26.11,101.31 | 26.11,101.31 v46.81,101.31 | v17.04,56.09 17.04,92.17 26.11,101.24 26.11,101.31
RTC_RST
  Top 0.15: U2.16 22.99,62.95 22.99,62.74 23.68,62.05 79.43,62.05 79.78,62.39 84.28,62.39 85.18,61.49 85.18,61.22 U3.4
RX
  Top 0.15: U2.24 12.88,63.02 12.88,66.06 TP2.TP
SCK  (via drill 0.3)
  Top 0.15: v14.06,43.63 14.06,45.5 U2.6 | TP8.TP 12.95,31.23 v14.06,32.34 14.06,32.27 16.41,29.92 45.7,29.92 47.37,31.58 R6.1 47.44,31.58 48.2,31.58 | v4.02,66.06 4.02,90.86 4.64,91.48 5.19,91.48 J4.P5 | U1.6 39.54,54.71 39.54,54.36 47.37,46.54 47.37,37.67 D10.2 47.44,37.6 v48.2,36.84 | 48.2,31.58 65.58,31.58 75.48,21.68 75.48,17.87 79.01,14.34 83.65,14.34 84.48,15.17 84.48,15.58 J1.13 | 48.2,31.58 v48.2,32.13
  Bottom 0.15: v14.06,32.34 v14.06,43.63 14.06,56.02 v4.02,66.06 | v48.2,32.13 v48.2,36.84
SCL  (via drill 0.3)
  Top 0.15: 158.2,14.85 158.38,14.68 158.38,14.4 SENSOR2.4 | 158.2,14.85 157.89,15.17 155.74,15.17 154.5,13.92 154.5,6.51 154.63,6.37 158.17,6.37 158.72,6.92 R2-PINH.1 | v141.55,47.16 136.98,51.73 136.56,51.73 U4.7 | v146.81,40.37 147.02,40.37 165.3,22.09 165.3,21.81 | 165.3,21.81 165.3,21.19 J3.4 | v160.31,16.97 158.2,14.85 | v165.16,21.81 165.3,21.81 | v91.2,66.13 86.49,70.84 24.17,70.84 17.94,64.61 17.94,63.02 U2.20 | v90.23,54.15 89.06,52.98 89.06,51.87 U3.16
  Bottom 0.15: v146.81,40.37 141.55,45.64 v141.55,47.16 127.07,47.16 120.84,53.39 89.89,53.39 89.82,53.46 89.26,53.46 88.92,53.81 88.92,54.08 89.26,54.43 89.89,54.43 90.16,54.15 v90.23,54.15 91.2,55.12 v91.2,66.13 | v165.16,21.81 v160.31,16.97
SDA  (via drill 0.3)
  Top 0.15: v157.61,9 157.61,6.99 R1_PINH.1 | v157.96,13.43 157.96,13.78 157.68,14.06 157.68,14.34 SENSOR2.3 | v142.17,47.16 137.12,52.22 136.56,52.22 U4.8 | v147.29,39.47 147.29,37.95 165.02,20.22 165.3,20.22 J3.3 164.81,20.36 v164.26,19.8 | v85.32,54.36 78.05,61.63 20.29,61.63 19.18,62.74 19.18,62.95 U2.19 | 87.67,52.22 v86.42,53.46 | 87.67,52.22 87.67,51.87 U3.15 87.67,52.22 | 87.67,52.22 v89.4,53.95
  Bottom 0.15: v157.61,9 157.61,10.04 157.96,10.39 v157.96,13.43 157.96,13.5 v164.26,19.8 | v147.29,39.47 147.29,40.51 142.17,45.64 v142.17,47.16 142.17,47.23 135.73,53.67 90.03,53.67 89.75,53.95 v89.4,53.95 | v85.32,54.36 85.52,54.36 v86.42,53.46
SRC  (via drill 0.3)
  Top 0.15: C4.2 94.73,34.21 92.52,34.21 89.26,30.95 89.26,29.15 D5.2 89.26,29.09 89.75,28.6 v89.75,28.39 | v69.94,16.97 69.94,19.18 Q3.3 | v80.75,31.51 78.6,31.51 L1.1
  Bottom 0.15: v69.94,16.97 71.67,15.23 71.67,14.2 72.02,13.85 83.65,13.85 89.96,20.15 89.96,28.18 v89.75,28.39 89.68,28.39 86.56,31.51 v80.75,31.51
SS_SD  (via drill 0.3)
  Top 0.15: 29.5,47.71 13.5,47.71 11.56,45.77 11.56,45.57 U2.4 | 29.5,47.71 30.26,47.71 R10.1 | v31.99,50.07 32.34,49.72 32.34,49.24 D8.2 | v29.5,47.78 29.5,47.71 | v6.16,70.7 6.23,70.77 6.23,87.53 5.68,88.09 5.68,88.22 J4.P2
  Bottom 0.15: v31.99,50.07 31.79,50.07 v29.5,47.78 29.15,47.78 26.8,45.43 24.93,45.43 24.58,45.77 24.58,46.33 6.16,64.75 v6.16,70.7
TX
  Top 0.15: U2.25 11.56,63.02 11.56,69.39 11.63,69.46 TP1.TP
USB_D+  (via drill 0.3)
  Top 0.15: v150.13,52.7 152.49,50.34 D1.1 | v31.99,52.84 v34.76,52.84 | v25.07,45.91 24.65,45.91 24.31,45.57 U2.14
  Bottom 0.15: v150.13,52.7 144.59,52.7 130.68,66.62 48.54,66.62 v34.76,52.84 | v25.07,45.91 v31.99,52.84
USB_D-  (via drill 0.3)
  Top 0.15: v151.52,48.2 151.73,48.41 152.49,48.41 D1.3 | v47.78,46.74 v84,46.74 | v25.07,44.8 24.79,44.53 23.68,44.53 22.99,45.22 22.99,45.5 U2.13
  Bottom 0.15: v151.52,48.2 151.52,43.07 144.59,36.15 120.91,36.15 115.65,41.41 115.65,52.01 115.3,52.35 96.67,52.35 91.06,46.74 v84,46.74 | v47.78,46.74 28.53,46.74 26.59,44.8 v25.07,44.8
VBAT
  Top 0.3: U4.2 134.55,51.73 134.55,51.31 U4.3 134.41,51.24 134.14,51.24 131.19,48.3 | 127.83,50.55 126.24,50.55 125.9,50.21 MCP73831.3 | 127.83,50.55 129.01,50.55 C2_BAT.1 129.08,50.41 131.19,48.3 | 131.19,48.3 131.44,48.06 131.44,47.71 Q1.3 | 127.83,50.55 127.83,53.74 TP3.TP
VBUS
  Top 0.3: D1.5 155.05,49.31 155.47,49.31 155.95,48.82 155.95,47.44 155.26,46.74 C5_USB.1 155.19,46.6 155.19,45.43 C4_USB.1 155.12,45.22 155.12,44.6 | 155.12,44.6 155.12,42.87 155.33,42.66 PFMF.050.1.2 | R1_PWRUSB.2 116.13,39.75 117.72,39.75 118.07,40.1 D2.2 118.21,40.23 118.21,49.17 118.31,49.27 | 123.06,50 120.43,50 CHG_LED.A | 123.06,50 123.2,50.14 MCP73831.4 | 123.06,50 123.13,49.86 123.13,49.65 127.21,45.57 130.47,45.57 Q1.1 130.61,45.5 131.3,44.8 151.66,44.8 151.87,44.6 155.12,44.6 | 118.31,49.27 118.35,49.24 119.66,49.24 120.29,49.86 CHG_LED.A | 118.31,49.27 117.86,49.72 116.96,49.72 C1_BAT.1 | TP14.TP 119.39,53.88 119.39,51.11 120.36,50.14 CHG_LED.A
VRTC
  Top 0.3: R_CAPACITOR.2 92.31,63.02 90.03,63.02 88.57,64.47 87.67,64.47 86.98,65.16 C8.1 86.98,64.96 85.87,63.85 85.87,52.42 86.36,51.94 U3.14 86.49,51.8 86.49,51.38 87.39,50.48 89.33,50.48 90.51,51.66 91.62,51.66 C10_SUPERCAP.1
VUSB
  Top 0.3: J2.A9 164.61,56.09 164.61,55.82 J2.B4 164.75,55.75 165.3,55.75 165.51,55.54 165.51,51.59 165.23,51.31 164.75,51.31 J2.B9 164.61,51.24 164.61,51.04 J2.A4 164.47,50.97 163.91,50.97 156.44,43.49 156.44,40.65 156.3,40.51 152.97,40.51 150.9,42.59 PFMF.050.1.1